# EAGLE board TRL_v1 (EAGLE 7.5.0)
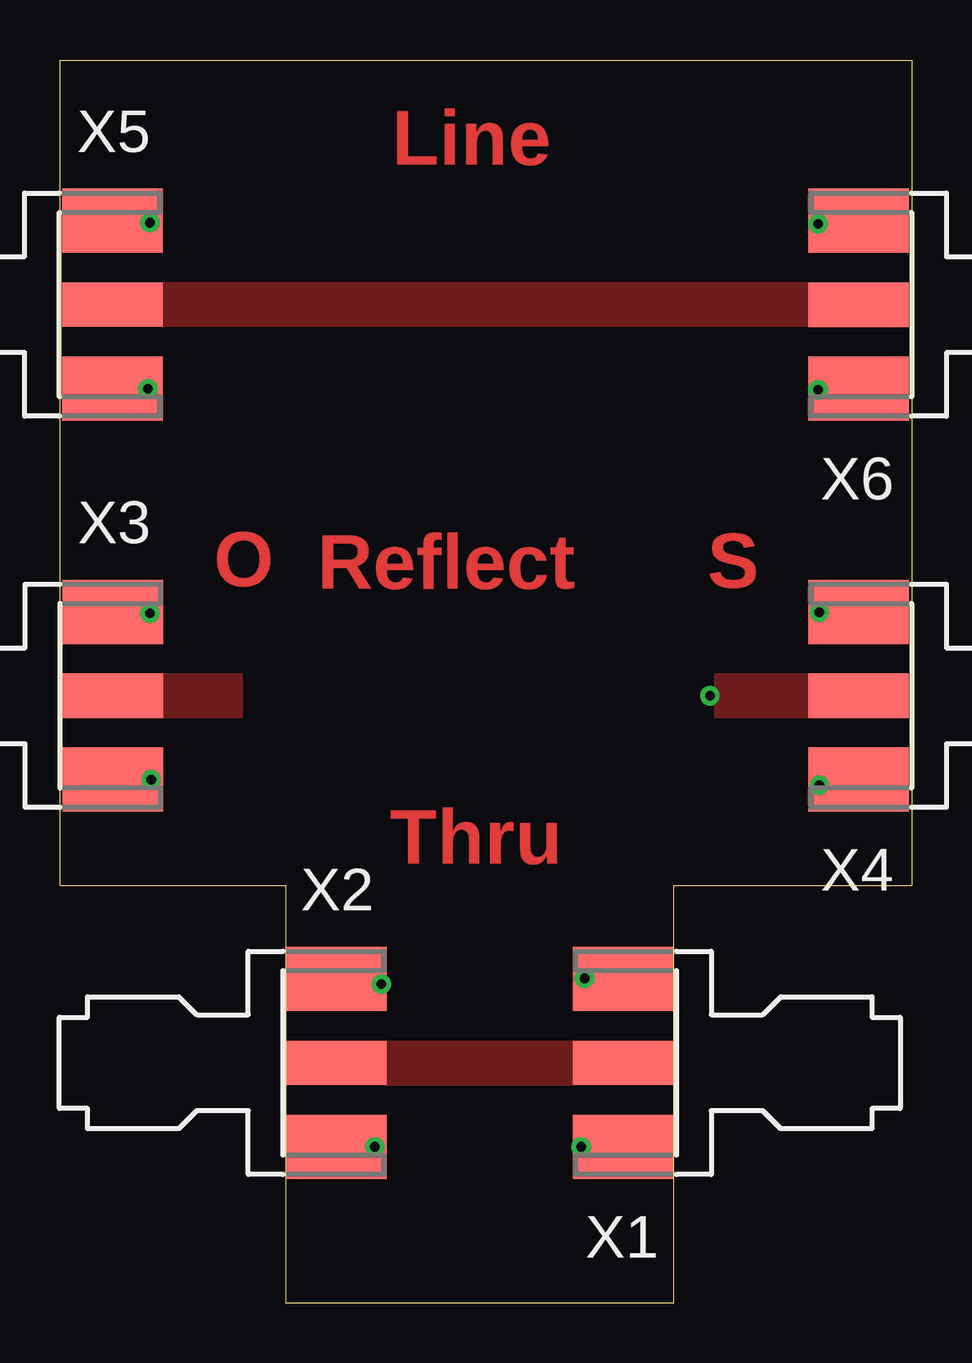
[diagram p0: board, top side]
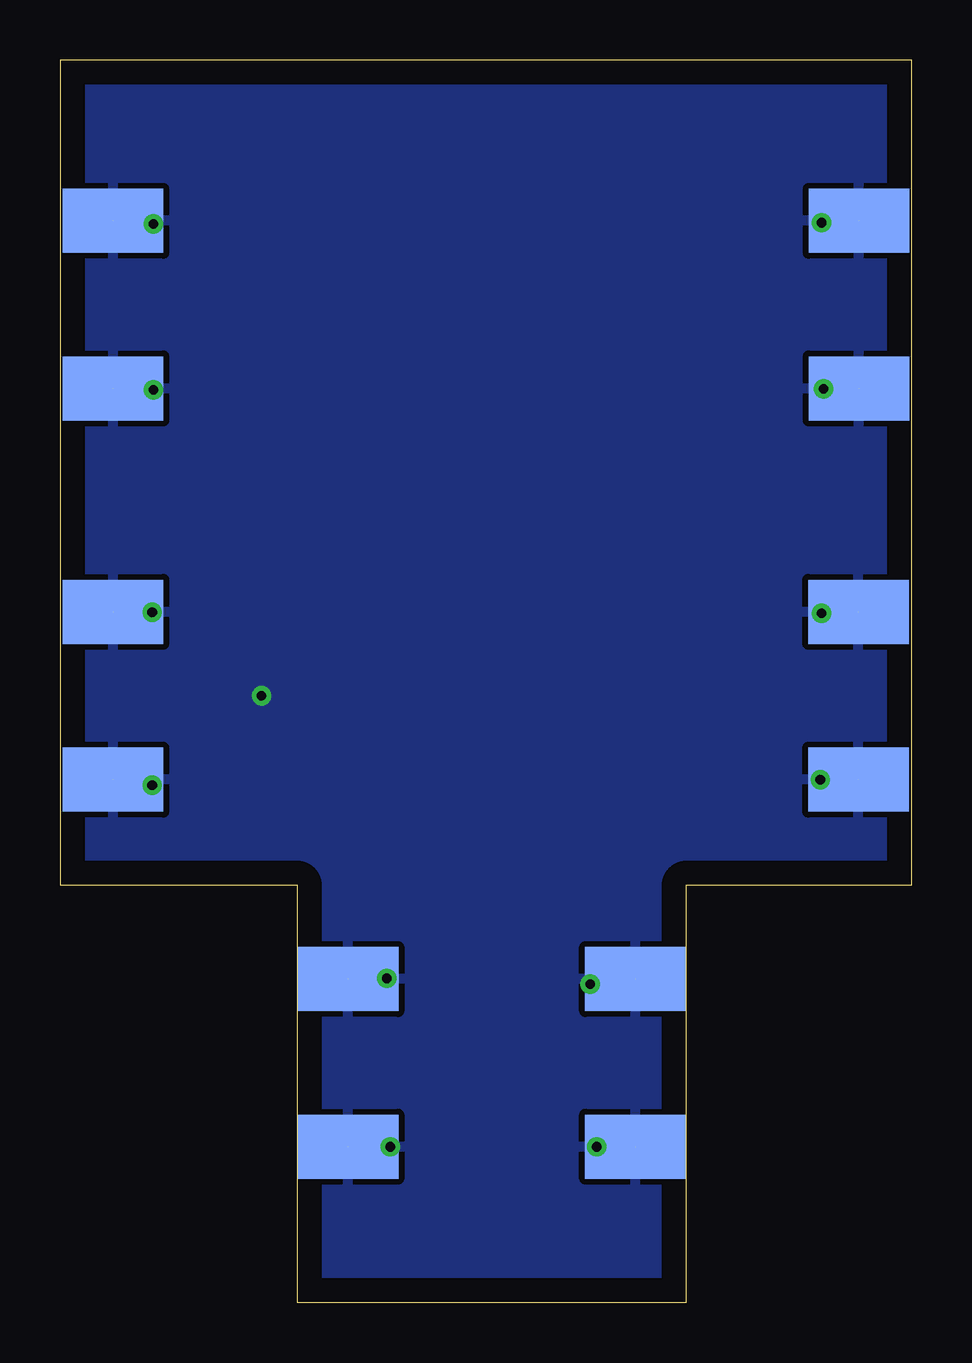
[diagram p1: board, bottom side, seen from below]

Size 35.5 x 51.8 mm. Coordinates in mm from the lower left corner, seen from the top.
Outline: 9.4,0 25.6,0 25.6,17.4 35.5,17.4 35.5,51.8 0,51.8 0,17.4 9.4,17.4 9.4,0
Copper layers (1*16): Top 0.035mm / dielectric 1.5mm / Bottom 0.035mm
Design rules "default": minimum track width 10mil, minimum drill 24mil, track to track 8mil, track to pad 8mil, pad to pad 8mil, via to via 8mil, smd to smd 8mil, copper to edge 40mil, drill to drill 8mil, minimum pad ring 10mil, minimum via ring 8mil, stop-mask expansion 4mil, vias tented up to drill 0mil, thermal gap 10mil

## Footprints (pad centres in the part's own frame; a part is rotated, then mirrored left to right if it is on the bottom)
J502-ND-142-0711-821/826 = smd 4.191 x 1.85: 1 2.115,0 | smd 4.191 x 2.667: G@1 2.115,3.495; G@2 2.115,-3.495 | smd 4.191 x 2.667 bottom: G@3 2.115,3.495; G@4 2.115,-3.495

## Placement (x,y rotation side)
X1  SMA-142-0711-821/826  [J502-ND-142-0711-821/826]  25.6,10 180 top
X2  SMA-142-0711-821/826  [J502-ND-142-0711-821/826]  9.4,10 0 top
X3  SMA-142-0711-821/826  [J502-ND-142-0711-821/826]  0.1,25.3 0 top
X4  SMA-142-0711-821/826  [J502-ND-142-0711-821/826]  35.4,25.3 180 top
X5  SMA-142-0711-821/826  [J502-ND-142-0711-821/826]  0.07,41.6 0 top
X6  SMA-142-0711-821/826  [J502-ND-142-0711-821/826]  35.4,41.6 180 top

## Library data of the parts
X1-X6 = con-coax; MF: JOHNSON COMPONENTS; MPN: 142-0711-821; OC_FARNELL: 1019328; OC_NEWARK: 16F3627

## Nets
GND: X1.G@1 X1.G@2 X1.G@3 X1.G@4 X2.G@1 X2.G@2 X2.G@3 X2.G@4 X3.G@1 X3.G@2 X3.G@3 X3.G@4 X4.1 X4.G@1 X4.G@2 X4.G@3 X4.G@4 X5.G@1 X5.G@2 X5.G@3 X5.G@4 X6.G@1 X6.G@2 X6.G@3 X6.G@4
OPEN: X3.1
QUARTER: X5.1 X6.1
THRU: X1.1 X2.1

## Tracks (layer width: path | path; a pad name or v marks a point on that pad's centre or on a via)
GND  (via drill 0.4)  (12 unrouted)
  Bottom 0: v3.76,28.73 2.21,28.73 X3.G@3 | v31.66,28.78 33.28,28.78 X4.G@2 | X4.G@3 31.66,21.8 v31.66,21.57
  other vias: 27.1,25.3 3.8,21.8 3.66,38.09 3.76,45.02 31.61,44.97 31.61,38.05 21.87,13.52 13.4,13.28 13.12,6.5 21.73,6.5
  pour Top (no thermals): 31.2,24.38 27.29,24.38 27.29,26.22 31.2,26.22
  pour Bottom: -1.7,-2.4 46.3,-2.4 46.3,55.6 -1.7,55.6
OPEN
  pour Top (no thermals): 7.62,24.38 3.71,24.38 3.71,26.22 7.62,26.22
QUARTER
  pour Top (no thermals): 31.19,40.68 4.28,40.68 4.28,42.53 31.19,42.53
THRU
  pour Top (no thermals): 21.4,9.07 13.6,9.07 13.6,10.92 21.4,10.92

## Text on the board
Top: Line | O | Reflect | S | Thru